# Altium PCB Lacuna_modem_pcb.PcbDoc
Units mm, origin at the board's own origin, x right, y up, seen from the top; angles counter-clockwise.
Board outline 45 x 45 mm, 2 copper layers (Top Layer, Bottom Layer), stack 1.671 mm thick; 21 components, 16 nets, 72 pads, 147 vias.
Unrouted connection lines stored in the file: 2.
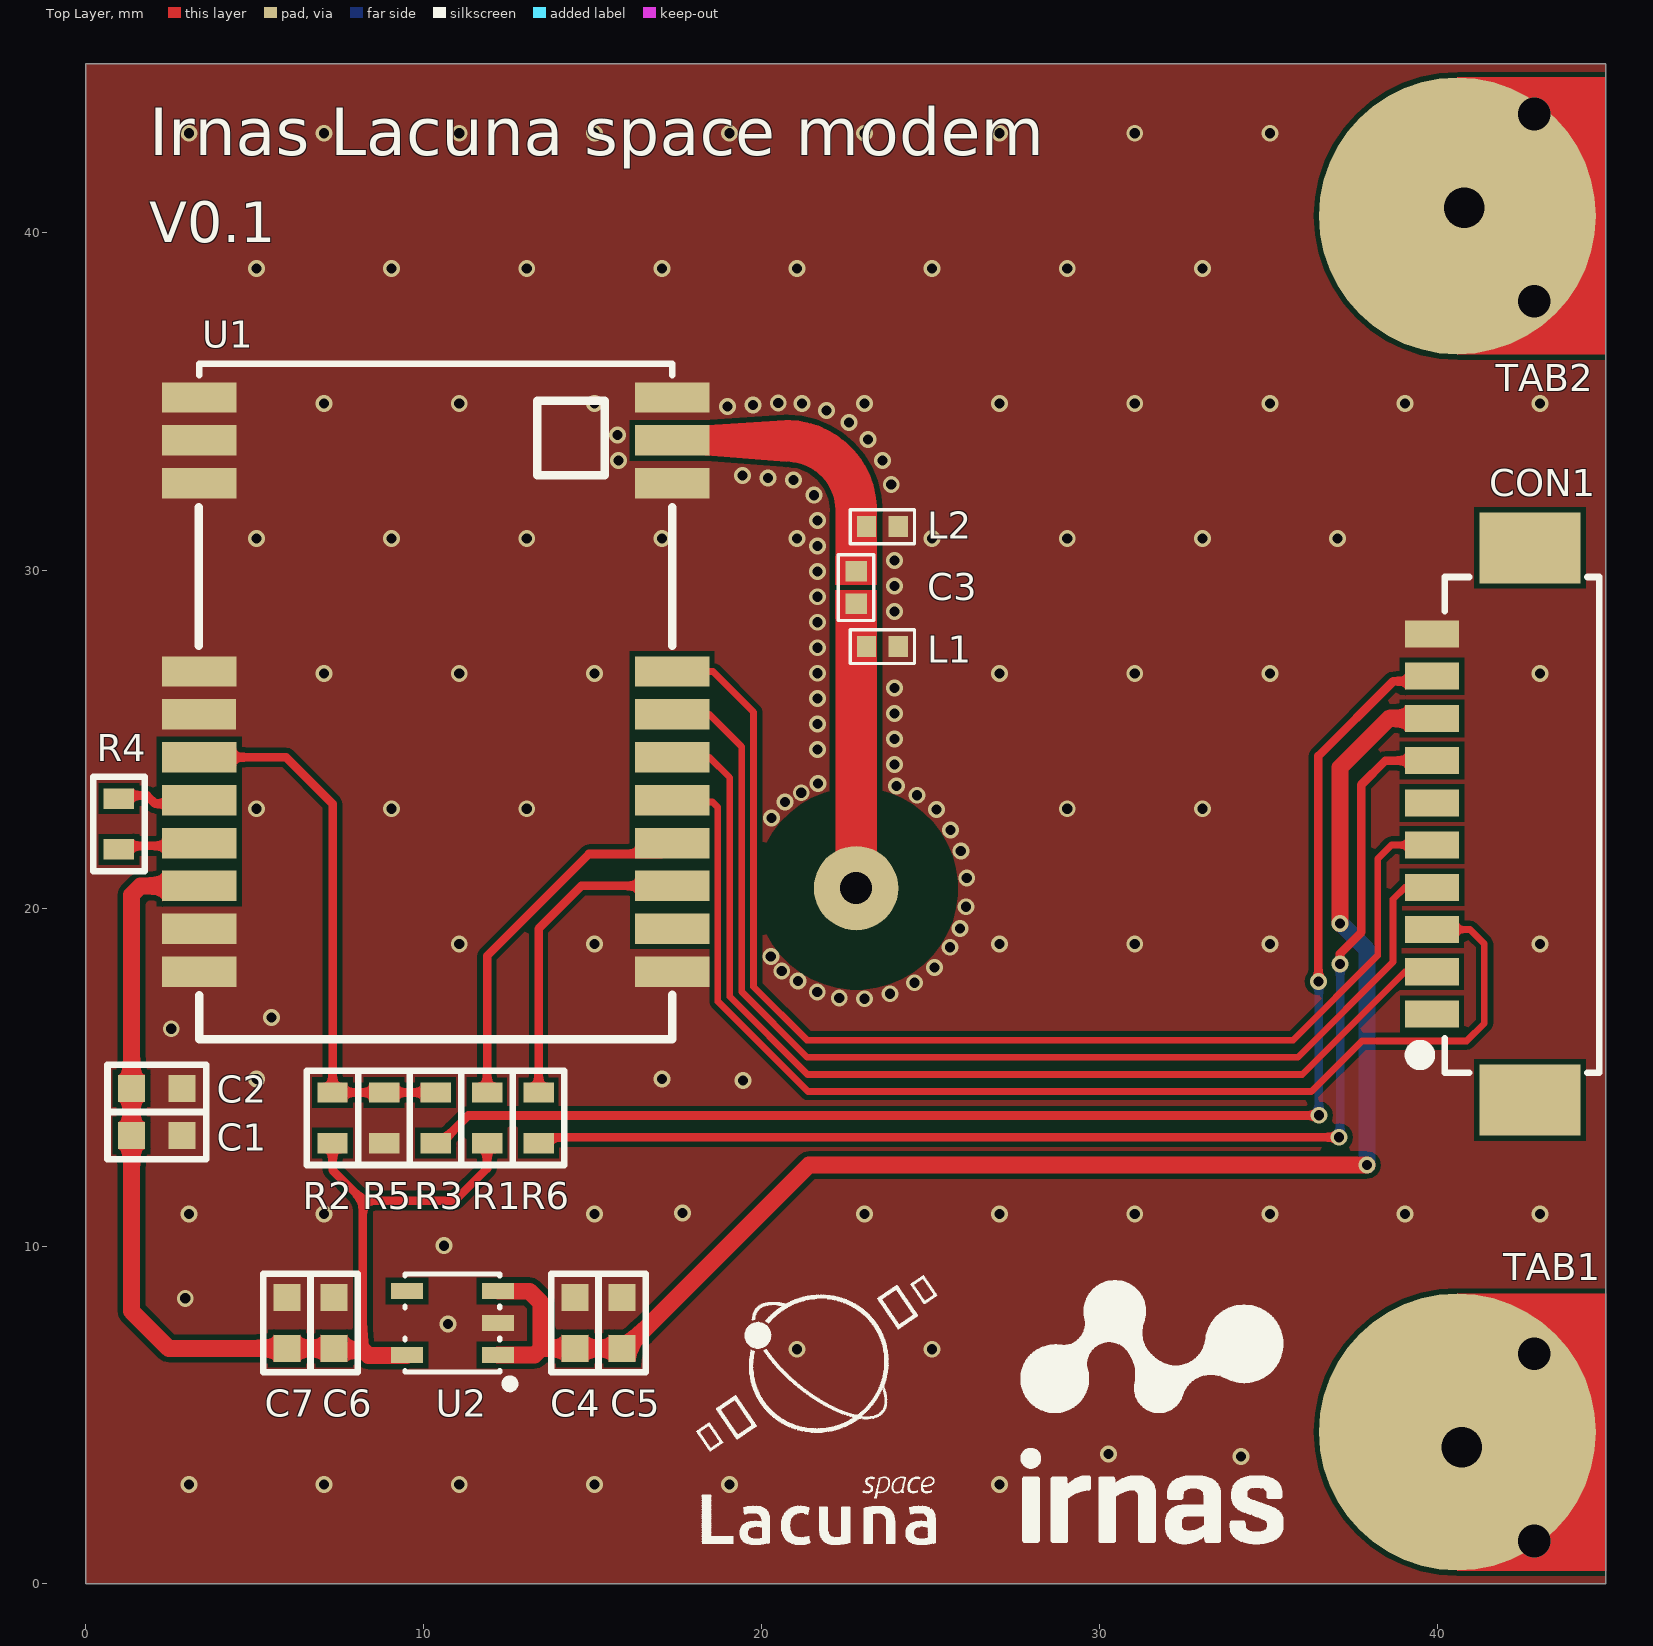
[diagram p0: Top Layer view]
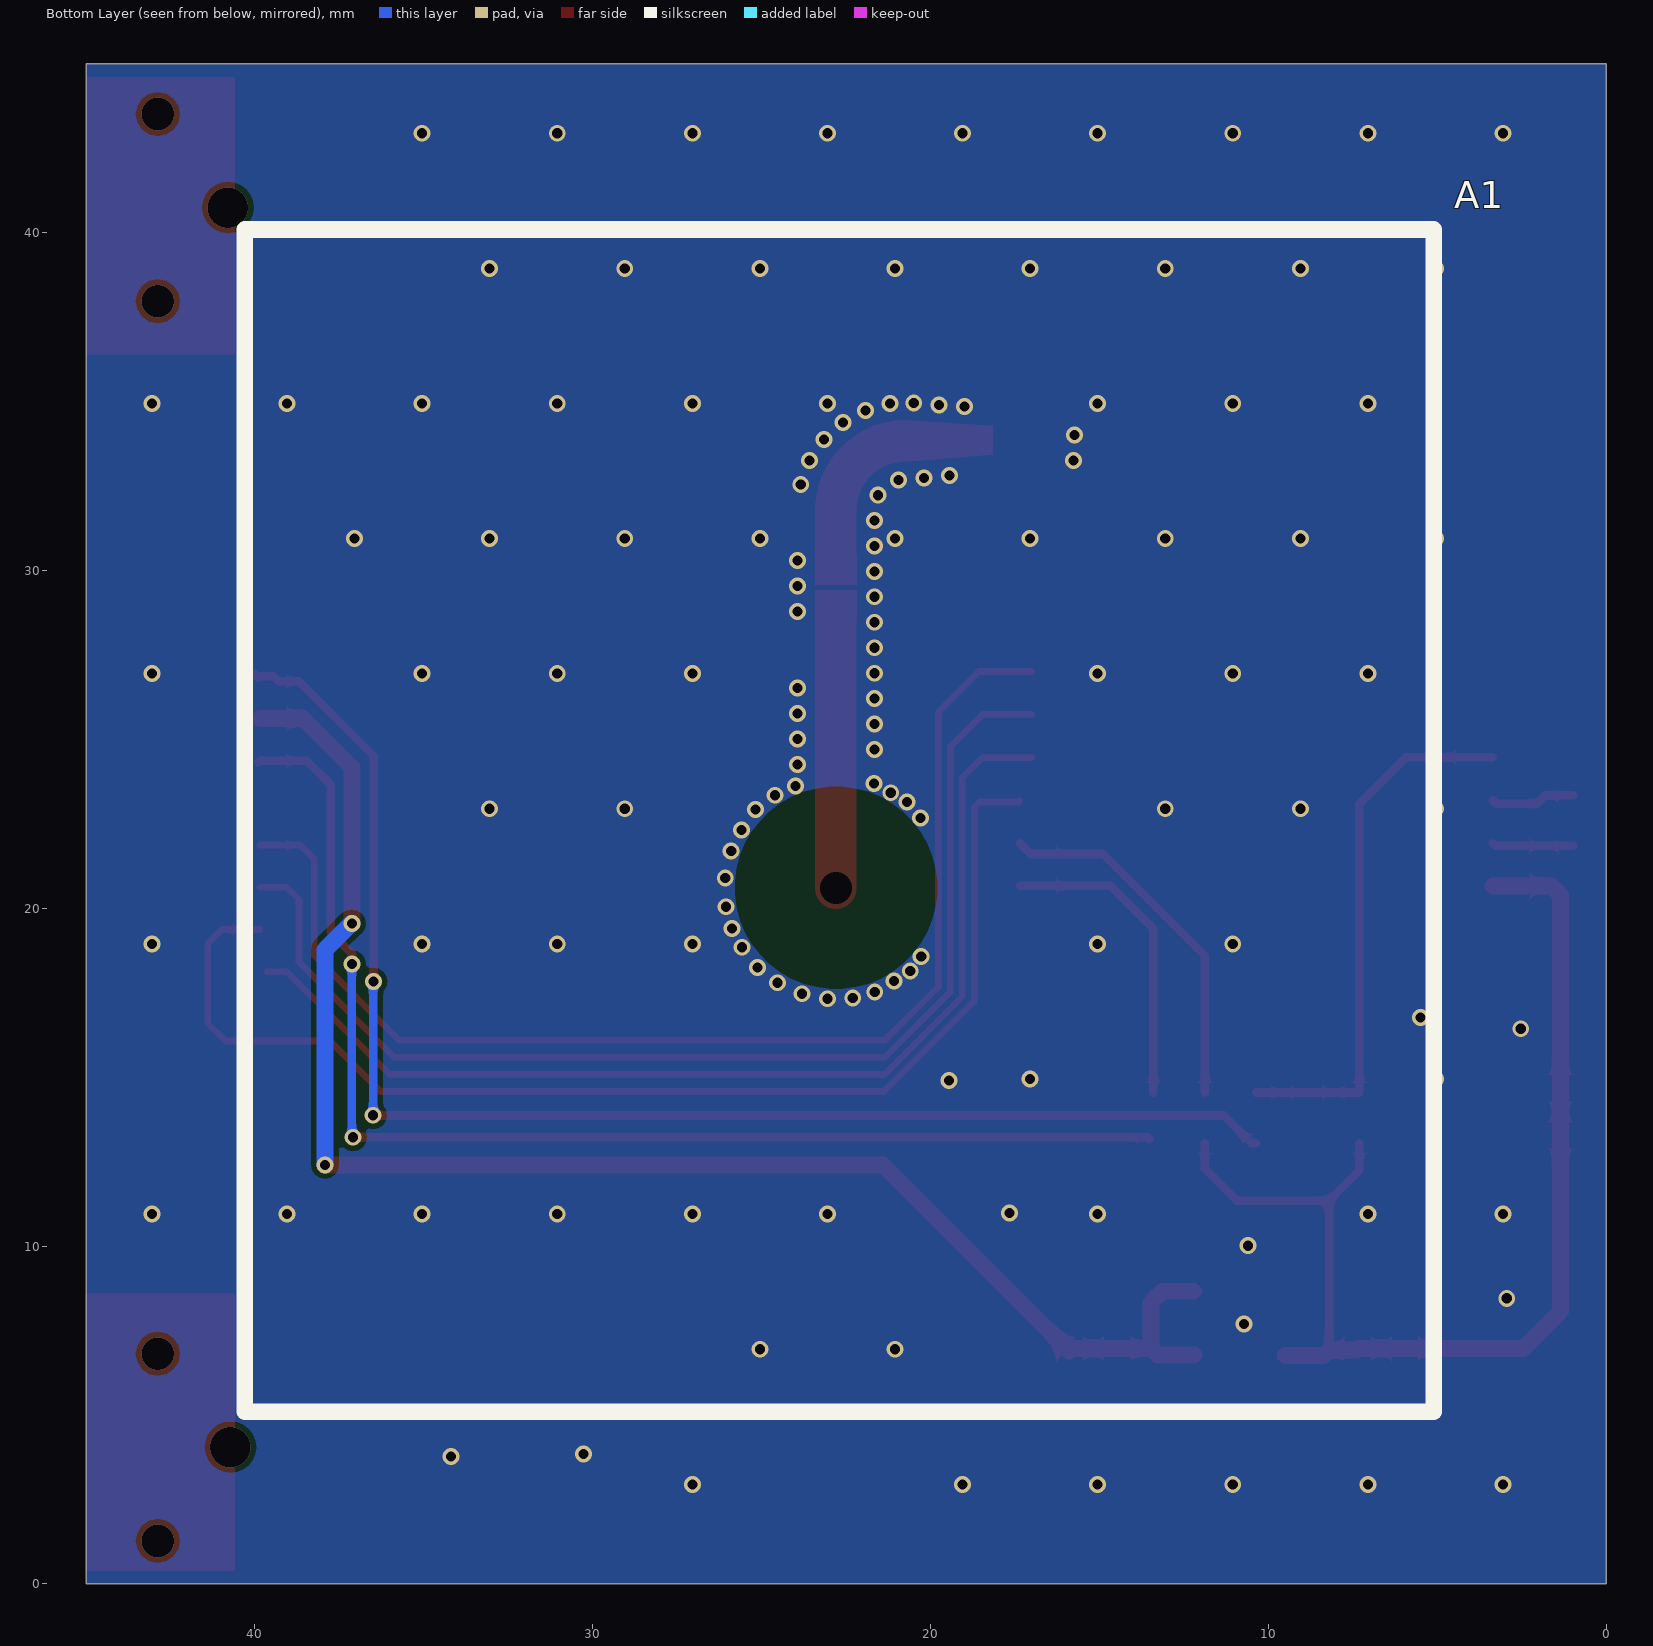
[diagram p1: Bottom Layer view, seen from below]
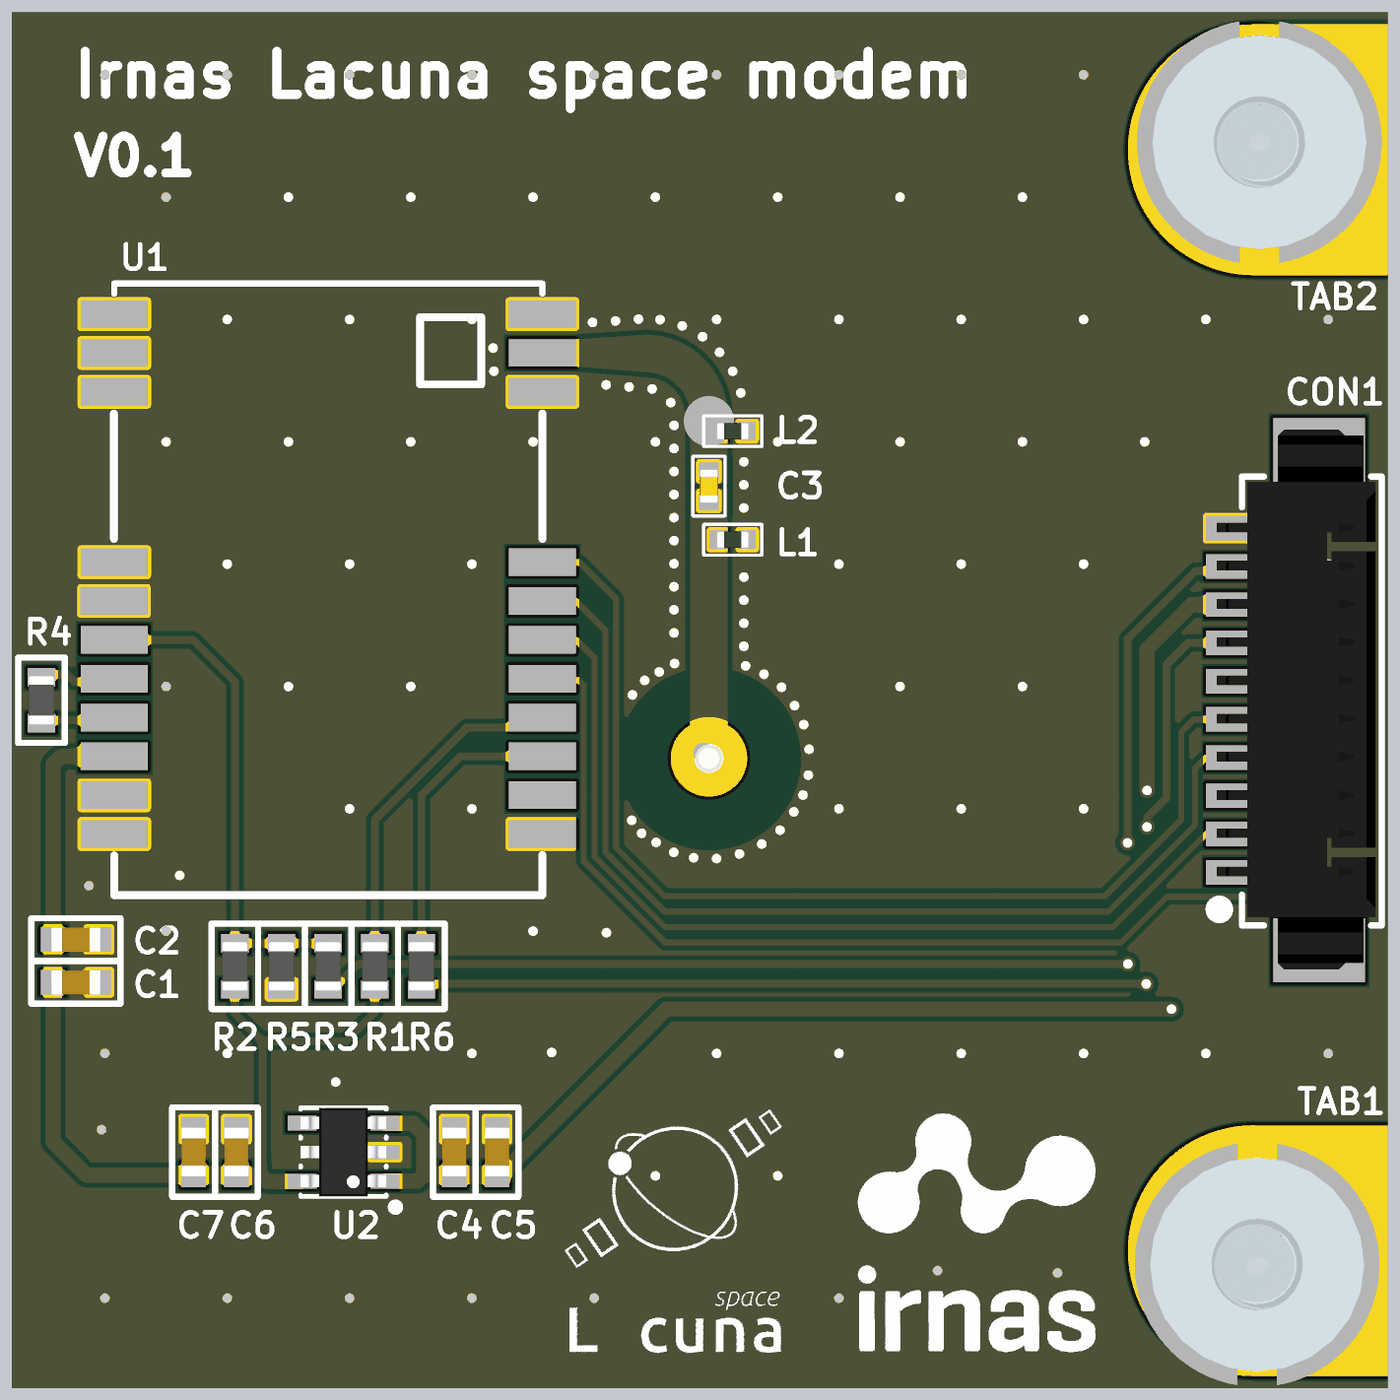
[diagram p2: 3D render of the assembled board from above, using the file's embedded part models]

## Layer stack, top to bottom
Top Solder: solder mask 0.0102, Solder Resist, Dk 3.5
Top Layer: signal copper 0.0356
Dielectric 1: dielectric 1.6, FR-4, Dk 4.8
Bottom Layer: signal copper 0.0356
Bottom Solder: solder mask 0.0102, Solder Resist, Dk 3.5

## Board outline
0,0 45,0 45,45 0,45

## Design rules (kind name [scope] priority, off if disabled: settings)
Clearance "Stitching GND" [IsStitchingVia and InNet('GND') vs (IsVia and (Not IsStitchingVia)) Or IsPad] p1: gap=0.127 ignorepadtopadclearanceinfootprint=FALSE
Clearance [All] p2: gap=0.152 ignorepadtopadclearanceinfootprint=FALSE
PlaneConnect [All] p1: planeconnectstyle=Direct reliefexpansion=0.508 reliefentries=4 reliefconductorwidth=0.254 reliefairgap=0.254
PolygonConnect [All] p1: connectstyle=Direct reliefconductorwidth=0.254 reliefentries=4 polygonreliefangle="90 Angle" airgapwidth=0.254
RoutingVias [All] p1: holewidth=0.3 width=0.5 viastyle="Through Hole" minholewidth=0.3 minwidth=0.5 maxholewidth=0.3 maxwidth=0.5
SolderMaskExpansion [All] p1: expansion=0.102
Width [All] p1: maxlimit=2 minlimit=0.2 preferedwidth=0.254 bottomlayer_maxwidth=0.5 minimp=50.000000 maximp=50.000000 favimp=50.000000
29 further rules are at their usual default settings.

## Classes and differential pairs
component class POWER,LORA: C1 C2 C4 C5 C6 C7 CON1 R1 R2 R3 R4 R5 R6 TAB1 TAB2 U1 U2
component class PAGE1-MAIN: A1 C3 L1 L2

## Components (designator, comment, footprint, x,y, rotation, side; value= is the part's Value field where it differs from the comment)
A1 "ISMP.868.35.6.A.02" ISMP.868.35.6.A.02 22.8,20.6 r180 bottom locked
C1 "1uF" CAP0603 2.1,13.275 r180 top
C2 "100nF" CAP0603 2.1,14.675 r180 top
C3 "1.8pF" CAP0402 22.8,29.5 r90 top
C4 "1uF" CAP0603 14.475,7.725 r270 top
C5 "100nF" CAP0603 15.875,7.725 r270 top
C6 "100nF" CAP0603 7.35,7.725 r270 top
C7 "1uF" CAP0603 5.95,7.725 r270 top
CON1 "53261-1071" "PICOBLADE 10PIN" 41.3,22.5 r90 top locked
L1 "4.3nH" IND0402 23.58,27.75 r180 top
L2 "4.3nH" IND0402 23.58,31.3 r180 top
R1 "10k" RES0603 11.875,13.8 r270 top
R2 "10k" RES0603 7.3,13.8 r270 top
R3 "0R" RES0603 10.35,13.8 r270 top
R4 "0R" RES0603 0.975,22.5 r270 top
R5 "10k" RES0603 8.825,13.8 r90 top
R6 "0R" RES0603 13.4,13.8 r270 top
TAB1 "WP-SMBU SMD" WP-SMBU#1 40.725,4.05 r0 top locked
TAB2 "WP-SMBU SMD" WP-SMBU#2 40.8,40.75 r0 top
U1 "E22-900M22S" E22-900M22S 10.35,26.625 r180 top
U2 "MIC5504-3.3YM5-TR" SOT23-5 10.85,7.725 r90 top

## Footprints (in the part's own frame and the unit in brackets; to place one, negate y for a bottom-side part, rotate by r counter-clockwise, add the part's x,y. Pads: shape width x height; smd on the part's side, far side on the other; paste and mask are expansions set on the pad)
CAP0402 [mm] "Chip Capacitor, 2-Leads, Body 1.00x0.50mm, IPC Medium Density"
  rect 0.6x0.64 smd: 1(-0.48,0) 2(0.48,0)
  silkscreen extent -0.97,-0.53 0.97,0.53, body extent -0.55,-0.3 0.55,0.3, height 0.45
CAP0603 [mm]
  rect 0.8x0.8 smd: 1(-0.75,0) 2(0.75,0)
  silkscreen extent -1.46,-0.7 1.46,0.7, body extent -0.8,-0.4 0.8,0.4, height 0.9
E22-900M22S [mm]
  rect 2.2x0.9 smd: 1(6.995,-8.5) 2(6.995,-7.23) 3(6.995,-5.96) 4(6.995,-0.39) 5(7.005,0.88) 6(6.995,2.15) 7(6.995,3.42) 8(6.995,4.69) 9(6.995,5.96) 10(6.995,7.23) 11(6.995,8.5) 12(-7.005,8.5) 13(-7.005,7.23) 14(-7.005,5.96) 15(-7.005,4.69) 16(-7.005,3.42) 17(-7.005,2.15) 18(-7.005,0.88) 19(-7.005,-0.39) 20(-7.005,-5.96) 21(-7.005,-7.23) 22(-7.005,-8.5)
  silkscreen extent -7,-9.5 7.01,10.5, body extent -7,-9.5 7,10.4, height 3.87
IND0402 [mm] "Chip Inductor, 2-Leads, Body 1.00x0.50mm, IPC Medium Density"
  rect 0.57x0.62 smd: 1(-0.47,0) 2(0.47,0)
  silkscreen extent -0.95,-0.5 0.95,0.5, body extent -0.52,-0.27 0.53,0.28, height 0.55
ISMP.868.35.6.A.02 [mm]
  round 0 / inner round 2.5 / far side round 2.5 hole 0.95: 1(0,0)
  silkscreen extent -17.5,-15.5 17.7,19.5, body extent -17.5,-15.5 20.5,19.5, height 6.5
"PICOBLADE 10PIN" [mm]
  rect 0.8x1.6 smd: 1(-5.625,1.45) 2(-4.375,1.45) 3(-3.125,1.45) 4(-1.875,1.45) 5(-0.625,1.45) 6(0.625,1.45) 7(1.875,1.45) 8(3.125,1.45) 9(4.375,1.45) 10(5.625,1.45)
  rect 2.1x3 smd: ""(-8.175,-1.45) ""(8.175,-1.45)
  silkscreen extent -7.36,-3.5 7.32,1.96, body extent -8.8,-3.31 8.85,1.89, height 3.4
RES0603 [mm]
  rect 0.6x0.9 smd: 1(-0.75,0) 2(0.75,0)
  silkscreen extent -1.4,-0.76 1.4,0.76, body extent -0.8,-0.42 0.8,0.42, height 0.8
SOT23-5 [mm]
  rect 0.48x0.95 smd: 1(-0.95,-1.35) 2(0,-1.35) 3(0.95,-1.35) 4(0.95,1.35) 5(-0.95,1.35)
  silkscreen extent -1.92,-1.83 1.45,1.4, body extent -1.45,-1.4 1.45,1.4, height 1.45
WP-SMBU#1 [mm]
  round 8.2 smd paste-10: 1(-0.125,0.45)
  body extent -3.5,-3.5 3.5,3.5, height 7
WP-SMBU#2 [mm]
  round 8.2 smd paste-10: 1(-0.2,-0.25)
  body extent -3.5,-3.5 3.5,3.5, height 7

## Part data
A1: library part "ANT - ISMP.868.35.6.A.02", "Patch Antenna, 868MHz, 2.17dBi Gain, 50ohm, Right Hand Circular Polarisation, Adhesive/Pin", Manufacturer=Antenova, Manufacturer Part Number=SR42I010-R, Supplier Part Number 1=2949079, ComponentLink1Description=Datasheet, ComponentLink1URL=http://www.farnell.com/datasheets/2703591.pdf?_ga=2.254622927.691918385.1573213895-1730437145.1573213895, Supplier 1=Farnell
C1 C4 C7: library part "C - 1uF", "MURATA - GRM188R61H105KAALD - CAP, MLCC, X5R, 1UF, 50V, 0603", Capacitance=1, Capacitance Tolerance="± 10%", Capacitor Terminals="SMD<!--FANDB--><div class=\"features-and-benefits-container\"><div class=\"features-and-benefits-description\"><span class=\"features-benefits-value\">The Murata GRM series capacitors are Multilayer Ceramic Chip Capacitors (MLCC) used for general purpose applications. These MLCC capacitors are classified into temperature compensating and high dielectric constant types depending on the change in electrostatic capacitance due to change in temperature. The temperature compensating capacitors feature a small rate of change in electrostatic capacitance as the temperature changes and are used for applications such as filters and high frequency circuit matching. The high dielectric constant capacitors use materials with a high dielectric constant and feature a large electrostatic capacitance. Typical applications are power supply decoupling and smoothing circuits.</span></div><div class=\"features-and-benefits-list\"><ul class=\"features-and-benefits-list-list\"><li class=\"features-and-benefits-list-item\">Large capacity and small size in a multilayer structure</li><li class=\"features-and-benefits-list-item\">Capacitance value ranging from 0.1pF to 220?F</li><li class=\"features-and-benefits-list-item\">Tin plated external electrodes, excellent solderability</li><li class=\"features-and-benefits-list-item\">Provides good high frequency characteristics</li><li class=\"features-and-benefits-list-item\">Excellent pulse response</li><li class=\"features-and-benefits-list-item\">High reliability</li><li class=\"features-and-benefits-list-item\">Capacitor size varies from 0.4×0.2mm to 5.7×5.0mm</li><li class=\"features-and-benefits-list-item\">Rated voltage of 2.5VDC to 3.15", Ceramic Capacitor Case="0603 [1608 Metric]", Dielectric Characteristic=X5, IRNAS Part No.=I-200006, Manufacturer=MURATA, Manufacturer Part Number=GRM188R61H105KAALD, Operating Temperature Max=85, Operating Temperature Min=-55, Supplier Part Number 1=1845736, Voltage Rating=50, Automotive Qualification Standard=-, Capacitance Tolerance ±="± 10%", ComponentLink1Description=http://www.farnell.com/datasheets/2048611.pdf, ComponentLink1URL=http://www.farnell.com/datasheets/2048611.pdf, MSL=-, Packaging="Cut Tape", Pricing 1="10=0.093, 100=0.062, 500=0.0507, 1000=0.0465, 2000=0.0429, 4000=0.0399, 20000=0.0372, 40000=0.0365 (GBP)", Product Range="GRM Series", RoHS=YES, Stock 1=62682, Supplier 1=Farnell, SVHC="No SVHC (17-Dec-2015)"
C2 C5 C6: library part "C - 100nF", "MURATA - GRM188R71C104KA01J - CAP, MLCC, X7R, 0.1UF, 16V, 0603", Capacitance=0.1, Capacitance Tolerance="± 10%", Ceramic Capacitor Case="0603 [1608 Metric]", Dielectric Characteristic=X7, IRNAS Part No.=I-200005, Manufacturer=MURATA, Manufacturer Part Number=GRM188R71C104KA01J, Operating Temperature Max=125, Operating Temperature Min=-55, Supplier Part Number 1=2688519, Voltage Rating=16, Automotive Qualification Standard=-, ComponentLink1Description=http://www.farnell.com/datasheets/2189124.pdf, ComponentLink1URL=http://www.farnell.com/datasheets/2189124.pdf, MSL="MSL 1 - Unlimited", Packaging="Cut Tape", Pricing 1="10=0.0145, 100=0.0126, 500=0.0081, 2500=0.0059, 5000=0.0052, 10000=0.0046, 50000=0.0036, 100000=0.0035 (GBP)", Product Range="GRM Series", RoHS=YES, Stock 1=18297, Supplier 1=Farnell, SVHC="No SVHC (20-Jun-2016"
C3: library part "C - 1.8pF/0402", "Multilayer Ceramic Capacitors MLCC - SMD/SMT 50volts 1.8pF C0G", Case/Package=0402, Case Code (Metric)=1005, Dielectric Material=Ceramic, IRNAS Part No.=/, Manufacturer=KEMET, Manufacturer Part Number=C0402C189B5GACTU, Max Operating Temperature=125°C, Min Operating Temperature=-55°C, Supplier Part Number 1=2820847, Voltage Rating=50V, Capacitance=1.8pF, Case Code (Imperial)=0402, ComponentLink1Description=https://datasheet.ciiva.com/5413/kem-c1003-c0g-smd-5413366.pdf, ComponentLink1URL=https://datasheet.ciiva.com/5413/kem-c1003-c0g-smd-5413366.pdf, Lead Free="Lead Free", Packaging="Tape and Reel", Pricing 1="10=0.463, 100=0.248, 500=0.182, 2500=0.153, 5000=0.134, 10000=0.11, 50000=0.0961 (EUR)", Stock 1=8950, Supplier 1=Farnell, Termination=SMD/SMT, Voltage Rating (DC)=50V
CON1: library part "PicoBlade 10pin", "Wire-To-Board Connector, Right Angle, 1.25 mm, 10 Contacts, Header, PicoBlade 53261 Series", Supplier Part Number 1=1125377, ComponentLink1Description=Datasheet, ComponentLink1URL=http://www.farnell.com/datasheets/2697773.pdf?_ga=2.235245378.2144023421.1568612611-1741076818.1563951383, Supplier 1=Farnell
L1 L2: library part "L - 4.3nH/0402", "Inductor RF Chip Multi-Layer 4.3nH 0.3nH 100MHz 8Q-Factor Air 300mA 210mOhm DCR 0402 Paper T/R", Case/Package=0402, Case Code (Metric)=1005, Current=300mA, DC Resistance (DCR)=210mR, Inductance=4.3nh, IRNAS Part No.=/, Manufacturer=Murata, Manufacturer Part Number=LQG15HN4N3S02D, Max Operating Temperature=125°C, Min Operating Temperature=-55°C, Package Quantity=10000, Self Resonant Frequency=6GHz, Supplier Part Number 1=490-6563-1-ND, Test Frequency=100MHz, Case Code (Imperial)=0402, ComponentLink1Description=http://uk.rs-online.com/webdocs/0f10/0900766b80f10808.pdf?src-supplier=RSComponents, ComponentLink1URL=http://uk.rs-online.com/webdocs/0f10/0900766b80f10808.pdf?src-supplier=RSComponents, ComponentLink2Description=http://search.murata.co.jp/Ceramy/image/img/PDF/ENG/L0075S0083LQG15HN.pdf?src-supplier=Avnet, ComponentLink2URL=http://search.murata.co.jp/Ceramy/image/img/PDF/ENG/L0075S0083LQG15HN.pdf?src-supplier=Avnet, ComponentLink3Description=http://www.farnell.com/datasheets/66026.pdf?src-supplier=Element14, ComponentLink3URL=http://www.farnell.com/datasheets/66026.pdf?src-supplier=Element14, ComponentLink4Description=https://www.verical.com/server-webapp/html/getDatasheet?partID=31252&src-supplier=Verical, ComponentLink4URL=https://www.verical.com/server-webapp/html/getDatasheet?partID=31252&src-supplier=Verical, ComponentLink5Description=http://search.murata.co.jp/Ceramy/image/img/PDF/ENG/L0075S0083LQG15HN.pdf?src-supplier=Avnet+Europe, ComponentLink5URL=http://search.murata.co.jp/Ceramy/image/img/PDF/ENG/L0075S0083LQG15HN.pdf?src-supplier=Avnet+Europe, ComponentLink6Description=https://search.murata.co.jp/Ceramy/image/img/P02/partnumberingAT_LQ3E.pdf?src-supplier=Digi-Key, ComponentLink6URL=https://search.murata.co.jp/Ceramy/image/img/P02/partnumberingAT_LQ3E.pdf?src-supplier=Digi-Key, Core Material=Air, Current Rating=300mA, DC Current=300mA, Depth=0.55mm, Height=0.5mm, Height - Seated (Max)=0.022inch, Lead Free="Lead Free", Length=1.05mm, Max DC Current=300mA, Military Standard=Not, Mount="Surface Mount", Packaging="Tape and Reel", Pricing 1="1 = 0.10000, 10 = 0.06100, 100 = 0.04040, 500 = 0.03366, 1000 = 0.02827, 2500 = 0.02423 (USD)", Q Factor=8, Radiation Hardening=No, REACH SVHC="No SVHC", RoHS=Yes, Shielding=Unshielded, Stock 1=3502, Supplier 1=Digi-Key, Termination=SMD/SMT, Width=0.02inch
R1 R2 R5: library part "R - 10k", "MULTICOMP - MCMR06X103 JTL - RES, CERAMIC, 10K, 5%, 0.1W, 0603", IRNAS Part No.=I-100008, Manufacturer=MULTICOMP, Manufacturer Part Number="MCMR06X103 JTL", Power Rating=100, Resistance=10, Resistance Tolerance="± 5%", Resistor Case Style="0603 [1608 Metric]", Resistor Element Material=Ceramic, Supplier Part Number 1=2073356, Temperature Coefficient="± 100", Voltage Rating=75, Automotive Qualification Standard="-<!--FANDB--><div class=\"features-and-benefits-container\"><div class=\"features-and-benefits-description\"><span class=\"features-benefits-value\">The Multicomp MCMR series resistors are automotive grade, anti sulphured thick film chip resistor. The resistance range includes E24 and E96 decade values from 1ohm to 10Mohm. These resistors are constructed on top of a high grade ceramic body.</span></div><div class=\"features-and-benefits-list\"><ul class=\"features-and-benefits-list-list\"><li class=\"features-and-benefits-list-item\">EIA 0402, 0603, 0805, 1206 chip sizes available</li><li class=\"features-and-benefits-list-item\">High reliability and stability</li><li class=\"features-and-benefits-list-item\">Automotive grade AEC-Q200 compliant</li><li class=\"features-and-benefits-list-item\">Complaint with (IEC 60068-1) 55/155/56 climatic category</li><li class=\"features-and-benefits-list-item\">Maximum operation voltage of 50V, 75V, 150V and 200V</li><li class=\"features-and-benefits-list-item\">Power rating of 62.5mW, 100mW, 125mW and 250mW</li><li class=\"features-and-benefits-list-item\">Available in ±1% and ±5% tolerance</li><li class=\"features-and-benefits-list-item\">Temperature coefficient (TCR) of +200ppm/°C, +100ppm/°C and -200ppm/°C to +400ppm/°C</li><li class=\"features-and-benefits-list-item\">Operating temperature range -55°C to 155", ComponentLink1Description=http://www.farnell.com/datasheets/1716707.pdf, ComponentLink1URL=http://www.farnell.com/datasheets/1716707.pdf, Packaging="Cut Tape", Pricing 1="10=0.0087, 100=0.0074, 500=0.0061, 1000=0.0048, 2500=0.0032, 5000=0.0024, 25000=0.0016, 50000=0.0013 (GBP)", Product Range="MCMR Series", RoHS=Y-EX, Stock 1=19791, Supplier 1=Farnell
R3 R4 R6: library part "R - 0R", "BOURNS - CR0603-J/-000ELF - RES, THICK FILM, 0R, 5%, 0.1W, 0603", IRNAS Part No.=I-100011, Manufacturer=BOURNS, Manufacturer Part Number=CR0603-J/-000ELF, Power Rating=100, Resistance=0, Resistance Tolerance="± 5%", Resistor Case Style="0603 [1608 Metric]", Resistor Element Material="Thick Film", Resistor Mounting="Surface Mount Device<!--FANDB--><div class=\"features-and-benefits-container\"><div class=\"features-and-benefits-description\"><span class=\"features-benefits-value\">The Bourns CR series are standard thick film chip resistors. These resistors provide flexibility of performance, space saving and low cost. The Resistance range includes E96 and E24 decade values from 1ohm to 10Mohm.</span></div><div class=\"features-and-benefits-list\"><ul class=\"features-and-benefits-list-list\"><li class=\"features-and-benefits-list-item\">0201, 0402, 0603, 0805, 1206, 1210, 2010, 2512 standard case sizes available</li><li class=\"features-and-benefits-list-item\">±1% and ±5% tolerance</li><li class=\"features-and-benefits-list-item\">±100ppm/°C, ±200ppm/°C and ±250ppm/°C TCR values available</li><li class=\"features-and-benefits-list-item\">Power rating selectable for 50mW, 63mW, 0.1W, 0.125W, 0.25W, 0.5W and 1W based on ordering</li><li class=\"features-and-benefits-list-item\">Jumpers are available for all size</li><li class=\"features-and-benefits-list-item\">3 layer termination process with nickel barrier prevents leaching & provides excellent solderability</li><li class=\"features-and-benefits-list-item\">Suitable for all type of soldering processes</li><li class=\"features-and-benefits-list-item\">Tight dimensional tolerances</li><li class=\"features-and-benefits-list-item\">Maximum working voltage depends on case size</li><li class=\"features-and-benefits-list-item\">Operating temperature of -55°C to +125°C(CR0201) and -55°C to +155", Supplier Part Number 1=2008343, Temperature Coefficient=-, Voltage Rating=50, Automotive Qualification Standard=-, ComponentLink1Description=http://www.bourns.com/engineering/CHPREZTR/cr0603.stp, ComponentLink1URL=http://www.bourns.com/engineering/CHPREZTR/cr0603.stp, ComponentLink2Description=http://www.farnell.com/datasheets/2178762.pdf, ComponentLink2URL=http://www.farnell.com/datasheets/2178762.pdf, MSL="MSL 1 - Unlimited", Packaging="Cut Tape", Pricing 1="10=0.0146, 250=0.0097, 1000=0.0073, 5000=0.0049, 12500=0.0042 (GBP)", Product Range="CR Series", RoHS=YES, Stock 1=58200, Supplier 1=Farnell, SVHC="No SVHC (17-Dec-2015)"
TAB1 TAB2: library part "TAB - WP-SMBU SMD", "WP-SMBU SMD Internal blind-hole thread w. Pins", Supplier Part Number 1=2405986, ComponentLink1Description=Datasheet, ComponentLink1URL=https://katalog.we-online.com/em/datasheet/7466103.pdf, Supplier 1=Farnell
U1: library part "RF - E22-900M22S", ComponentLink1Description=Datasheet, ComponentLink1URL=http://www.ebyte.com/en/downpdf.aspx?id=437
U2: library part "V_LIN - MIC5504-3.3YM5-TR _1", "Fixed LDO Voltage Regulator, 2.5V to 5.5V, 160mV Dropout, 3.3Vout, 300mAout, SOT-23-5", DC / DC Converter IC Case=TO-263, Input Voltage Max=45, Input Voltage Min=4.5, Manufacturer="ON SEMICONDUCTOR", Manufacturer Part Number=LM2596DSADJG, Operating Temperature Max=125, Output Current=3, Output Voltage Max=37, Output Voltage Min=1.23, Supplier Part Number 1=2510377, Switching Frequency=150, Automotive Qualification Standard=-, ComponentLink1Description=Datasheet, ComponentLink1URL=http://www.farnell.com/datasheets/2108564.pdf?_ga=2.247133379.691918385.1573213895-1730437145.1573213895, MSL="MSL 1 - Unlimited", No. of Outputs=1, No. of Pins=5, Packaging=Each, Product Range=-, RoHS=YES, Supplier 1=Farnell, SVHC="No SVHC (12-Jan-2017", Topology="Buck (Step Down)"

## Via types
v1: diameter 0.5, hole 0.3, Top Layer to Bottom Layer, tented both sides, 141 vias
v2: diameter 0.97, hole 0.97, Top Layer to Bottom Layer, tented both sides, 4 vias
v3: diameter 1.2, hole 1.2, Top Layer to Bottom Layer, tented both sides, 2 vias

## Nets (pads, with @x,y where several pads share a name; then routed paths per layer and width w, separated by ;. In a path a pad name is that pad's centre, name@x,y a point inside that pad or via, vN(x,y) a via of type N, cw(c..) or ccw(c..) an arc to the next point about the centre after c; other vN are vias at no path point)
3V3: C1.2 C2.2 C6.2 C7.2 R1.2 R2.2 U1.9 U2.5 | length 34.4
  Top Layer w0.254: R2.2 7.3,12.25 8.2,11.35 ; 8.2,6.925 8.2,11.35 ; R1.2 11.875,12.3 10.925,11.35 8.2,11.35
  Top Layer w0.5: U1.9 1.615,20.665 1.35,20.4 C2.2 C1.2 1.35,8.075 2.45,6.975 C7.2 C6.2 7.4,6.925 8.2,6.925 8.36,6.765 U2.5@9.49,6.765
5V: C4.2 C5.2 CON1.8 U2.1 U2.3 | length 46.4
  Top Layer w0.5: U2.1 13.275,6.775 13.475,6.975 ; U2.3@12.21,8.665 13.135,8.665 13.475,8.325 13.475,6.975 ; v1(37.127,19.551) 37.127,24.177 38.575,25.625 CON1.8 ; v1(37.925,12.4) 21.4,12.4 15.9,6.9 15.85,6.95 C5.2 C4.2 13.475,6.975
  Bottom Layer w0.5: v1(37.127,19.551) 37.149,19.551 37.925,18.775 v1(37.925,12.4)
DIO1: CON1.7 R6.2 | length 36.8
  Top Layer w0.254: R6.2@13.519,13.169 13.575,13.225 v1(37.1,13.225) ; v1(37.125,18.358) 37.125,18.657 37.758,19.29 37.758,23.662 38.47,24.375 CON1.7 CON1.7@39.9,24.325
  Bottom Layer w0.254: v1(37.1,13.225) 37.131,13.256 37.131,18.352 v1(37.125,18.358)
GND: C1.1 C2.1 C4.1 C5.1 C6.1 C7.1 CON1.10 L1.1 L2.1 R5.1 U1.1 U1.2 U1.3 U1.4 U1.5 U1.10 U1.11 U1.12 U1.20 U1.22 U2.2
  other v1: 3.05,2.95 7.05,2.95 11.05,2.95 15.05,2.95 19.05,2.95 27.05,2.95 34.2,3.775 30.275,3.85 21.05,6.95 25.05,6.95 10.717,7.701 2.939,8.457 10.596,10.015 3.05,10.95 7.05,10.95 15.05,10.95 23.05,10.95 27.05,10.95 31.05,10.95 35.05,10.95 39.05,10.95 43.05,10.95 17.658,10.984 19.45,14.9 5.05,14.95 17.05,14.95 2.524,16.438 5.495,16.772 23.05,17.325 22.3,17.35 23.8,17.475 21.65,17.525 24.525,17.8 21.075,17.85 20.6,18.15 25.125,18.25 20.275,18.575 25.575,18.85 11.05,18.95 15.05,18.95 27.05,18.95 31.05,18.95 35.05,18.95 43.05,18.95 25.875,19.4 26.05,20.05 26.075,20.9 25.9,21.7 25.6,22.325 20.3,22.675 25.175,22.925 5.05,22.95 9.05,22.95 13.05,22.95 29.05,22.95 33.05,22.95 20.7,23.15 24.6,23.35 21.175,23.425 24,23.625 21.675,23.7 23.942,24.264 21.658,24.701 23.942,25.018 21.658,25.455 23.942,25.772 21.658,26.209 23.942,26.526 7.05,26.95 11.05,26.95 15.05,26.95 27.05,26.95 31.05,26.95 35.05,26.95 43.05,26.95 21.658,26.963 21.658,27.717 21.658,28.471 23.942,28.788 21.658,29.225 23.942,29.542 21.658,29.979 23.942,30.296 21.658,30.733 5.05,30.95 9.05,30.95 13.05,30.95 17.05,30.95 21.05,30.95 25.05,30.95 29.05,30.95 33.05,30.95 37.05,30.95 21.658,31.487 21.55,32.233 23.84,32.551 20.942,32.68 20.191,32.746 19.44,32.811 15.77,33.261 23.578,33.258 23.148,33.877 15.741,34.015 22.592,34.387 21.927,34.743 18.992,34.855 19.745,34.903 7.05,34.95 11.05,34.95 15.05,34.95 21.201,34.945 23.05,34.95 27.05,34.95 31.05,34.95 35.05,34.95 39.05,34.95 43.05,34.95 20.497,34.962 5.05,38.95 9.05,38.95 13.05,38.95 17.05,38.95 21.05,38.95 25.05,38.95 29.05,38.95 33.05,38.95 3.05,42.95 7.05,42.95 11.05,42.95 15.05,42.95 19.05,42.95 23.05,42.95 27.05,42.95 31.05,42.95 35.05,42.95
GPIO_1: CON1.9 R3.2 | length 41.9
  Top Layer w0.254: R3.2 10.5,13.05 11.319,13.869 36.494,13.869 v1(36.5,13.875) ; v1(36.488,17.838) 36.488,24.513 38.7,26.725 39.3,26.725 39.45,26.875 CON1.9 39.9,26.825 40.05,26.975 CON1.9@40.175,26.85
  Bottom Layer w0.254: v1(36.488,17.838) 36.5,17.825 v1(36.5,13.875)
LORA_ANT: C3.2 L2.2 U1.21 | length 4.7
  Top Layer w1.232: 20.779,33.841 cw(c20.74,31.776) 22.8,31.625 22.8,30.3
NetA1_1: A1.1 C3.1 L1.2 | length 8.4
  Top Layer w0.254: A1.1@22.618,20.782 A1.1
  Top Layer w1.232: A1.1 22.8,28.7
NetR1_1: R1.1 U1.15 | length 10.9
  Top Layer w0.254: R1.1 11.875,18.593 14.894,21.612 17.032,21.612 U1.15
NetR2_1: R2.1 R3.1 R5.2 U1.6 | length 16.1
  Top Layer w0.254: U1.6 5.925,24.475 7.3,23.1 R2.1 R3.1
NetR4_1: R4.1 U1.7 | length 2.5
  Top Layer w0.254: R4.1@0.975,23.35 0.981,23.344 1.806,23.344 2.05,23.1 3.25,23.1 U1.7
NetR4_2: R4.2 U1.8 | length 2.4
  Top Layer w0.254: R4.2@0.975,21.85 3.27,21.85 U1.8
NetR6_1: R6.1 U1.14 | length 9.3
  Top Layer w0.254: R6.1 13.4,19.4 14.665,20.665 U1.14
SPI_MISO: CON1.3 U1.16 | length 35.9
  Top Layer w0.2: U1.16 ccw(c17.41,23.205) 17.41,23.15 18.55,23.15 18.707,22.993 18.707,17.243 21.374,14.576 36.276,14.576 37.775,16.075 40.875,16.075 41.4,16.6 41.4,18.951 40.976,19.375 CON1.3
SPI_MOSI: CON1.2 U1.17 | length 31.6
  Top Layer w0.2: U1.17@17,24.47 18.46,24.47 19.06,23.87 19.06,17.389 21.364,15.084 36.009,15.084 39.05,18.125 CON1.2@39.65,18.125
SPI_NSS: CON1.5 U1.19 | length 36.2
  Top Layer w0.2: U1.19@17,27.01 18.565,27.01 19.765,25.81 19.765,17.681 21.345,16.1 35.741,16.1 38.242,18.601 38.242,21.467 38.65,21.875 CON1.5
SPI_SCK: CON1.4 U1.18 | length 34.5
  Top Layer w0.2: U1.18@17,25.74 18.46,25.74 19.412,24.788 19.412,17.535 21.355,15.592 35.875,15.592 38.696,18.413 38.696,20.271 39.05,20.625 CON1.4
pads on no net: CON1. CON1.1 CON1.6 TAB1.1 TAB2.1 U1.13 U2.4
copper on no net:
  other v2: 42.875,1.275 42.875,6.815 42.875,37.975 42.875,43.515
  other v3: 40.725,4.05 40.8,40.75

## Polygon pours and split planes (outlines as drawn)
GND on Bottom Layer "Bottom Layer-GND" (solid, pour order 3): 0,0 45,0 45,45 0,45
GND on Top Layer "Top Layer-GND" (solid, pour order 4): 0,0 45,0 45,45 0,45

## Other copper
Top Layer:
  pour cut-out: 19.83,20.587 ccw(c22.819,20.587) 22.819,17.597 ccw(c22.819,20.587) 25.808,20.587 ccw(c22.819,20.587) 22.819,23.576 ccw(c22.819,20.587)
  region: 45.002,0.391 40.602,0.391 40.602,8.591 45.002,8.591
  pour cut-out: 22.022,29.847 22.018,29.267 23.581,29.267 23.579,29.829
  region net NetA1_1: 23.416,28.575 23.416,29.42 22.186,29.42 22.186,28.575
  region: 22.8,29.68
  region net LORA_ANT: 22.185,30.425 22.185,29.58 23.415,29.58 23.415,30.425
  region: 22.48,29.68
  region: 40.6,44.6 45,44.6 45,36.4 40.6,36.4
  region net LORA_ANT: 18.15,34.285 20.7,34.45 20.725,33.228 18.15,33.432
  region: 18.455,33.405
Bottom Layer:
  pour cut-out: 19.805,20.612 ccw(c22.794,20.612) 22.794,17.622 ccw(c22.794,20.612) 25.783,20.612 ccw(c22.794,20.612) 22.794,23.601 ccw(c22.794,20.612)
  pour cut-out: 22.8,20.6

## Silkscreen, mask and mechanical layers (free items; w line width, h text height)
Top Overlay:
  drawing of 24 lines, arcs and shapes, not listed
  text "Irnas Lacuna space modem" at 1.875,42.3 h1.4
  text "V0.1" at 1.875,39.725 h1.2
Top Solder:
  region: 40.6,8.7 45,8.7 45,0.3 40.6,0.3
  region: 40.6,44.6 45,44.6 45,36.3 40.6,36.3

## Dimensions
0,45 to 45,45 on Mechanical 1
45,0 to 45,45 on Mechanical 1